# Altium PCB PCBFireflyCase.PcbDoc (part 1 of 2)
Units mil, origin at the board's own origin, x right, y up, seen from the top; angles counter-clockwise.
Board outline 2748 x 1806 mil, 2 copper layers (Top Layer, Bottom Layer); 145 components, 133 nets, 518 pads, 154 vias.
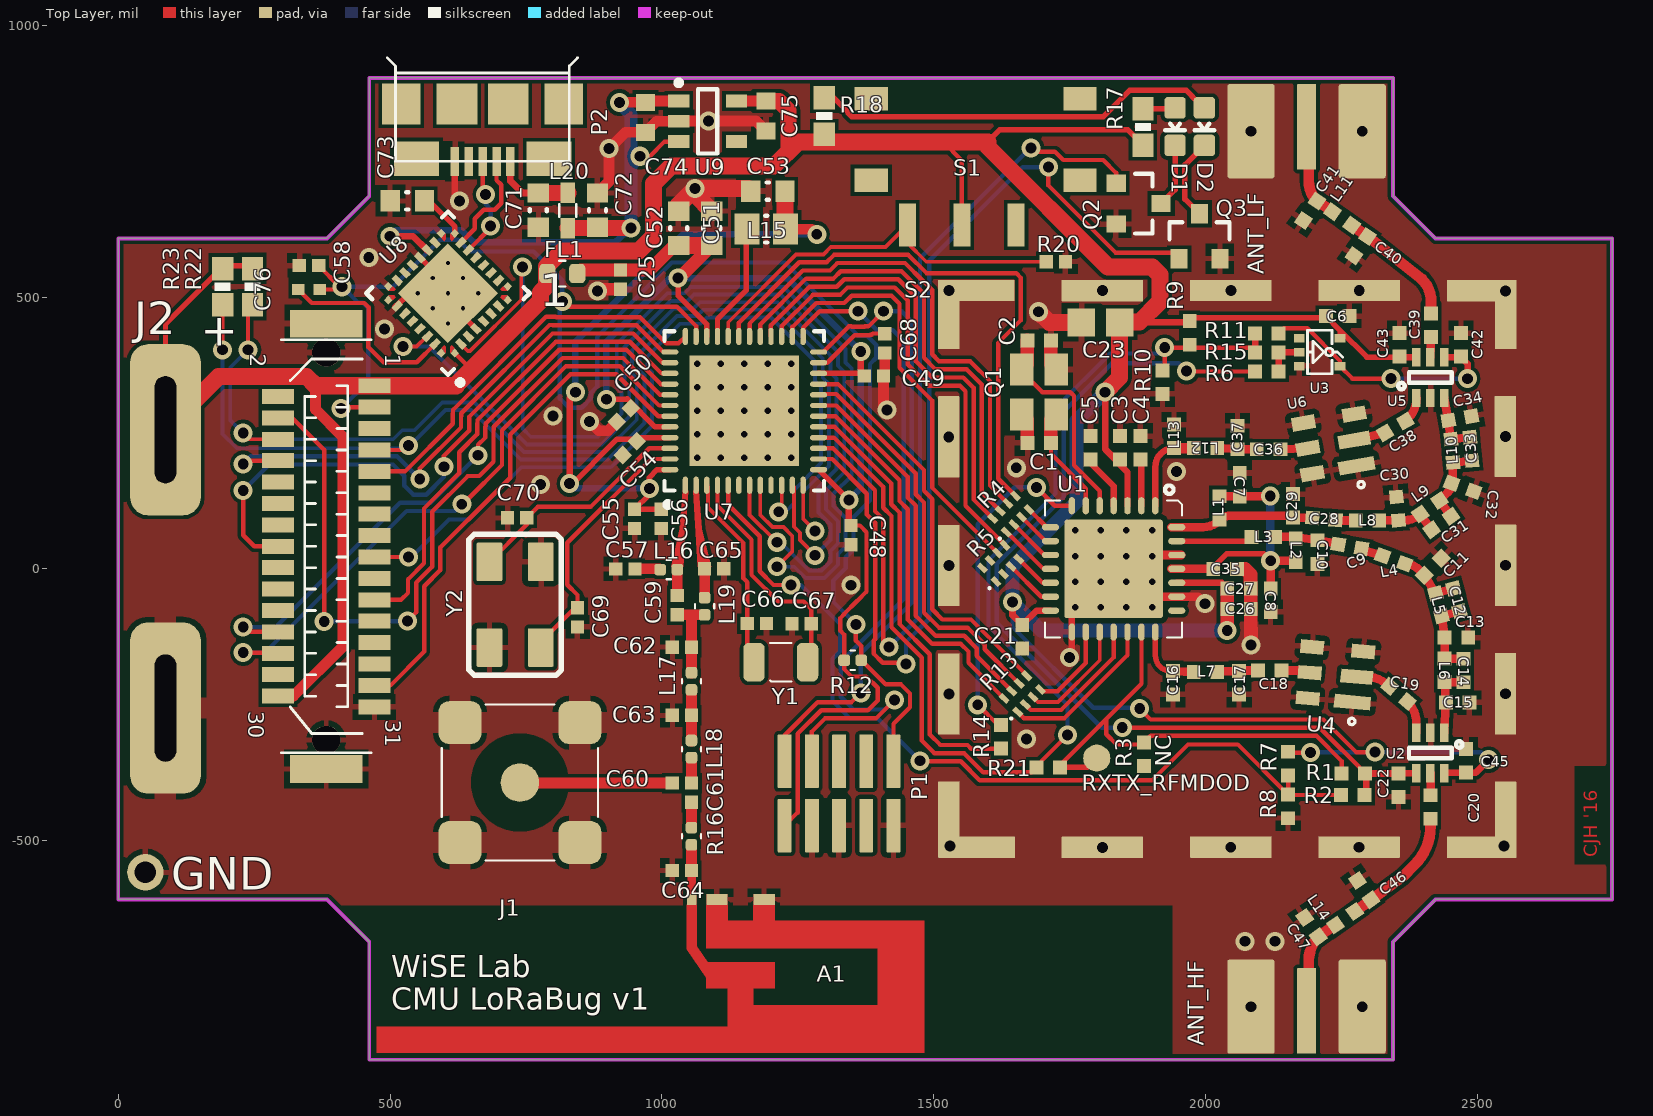
[diagram p0: Top Layer view]
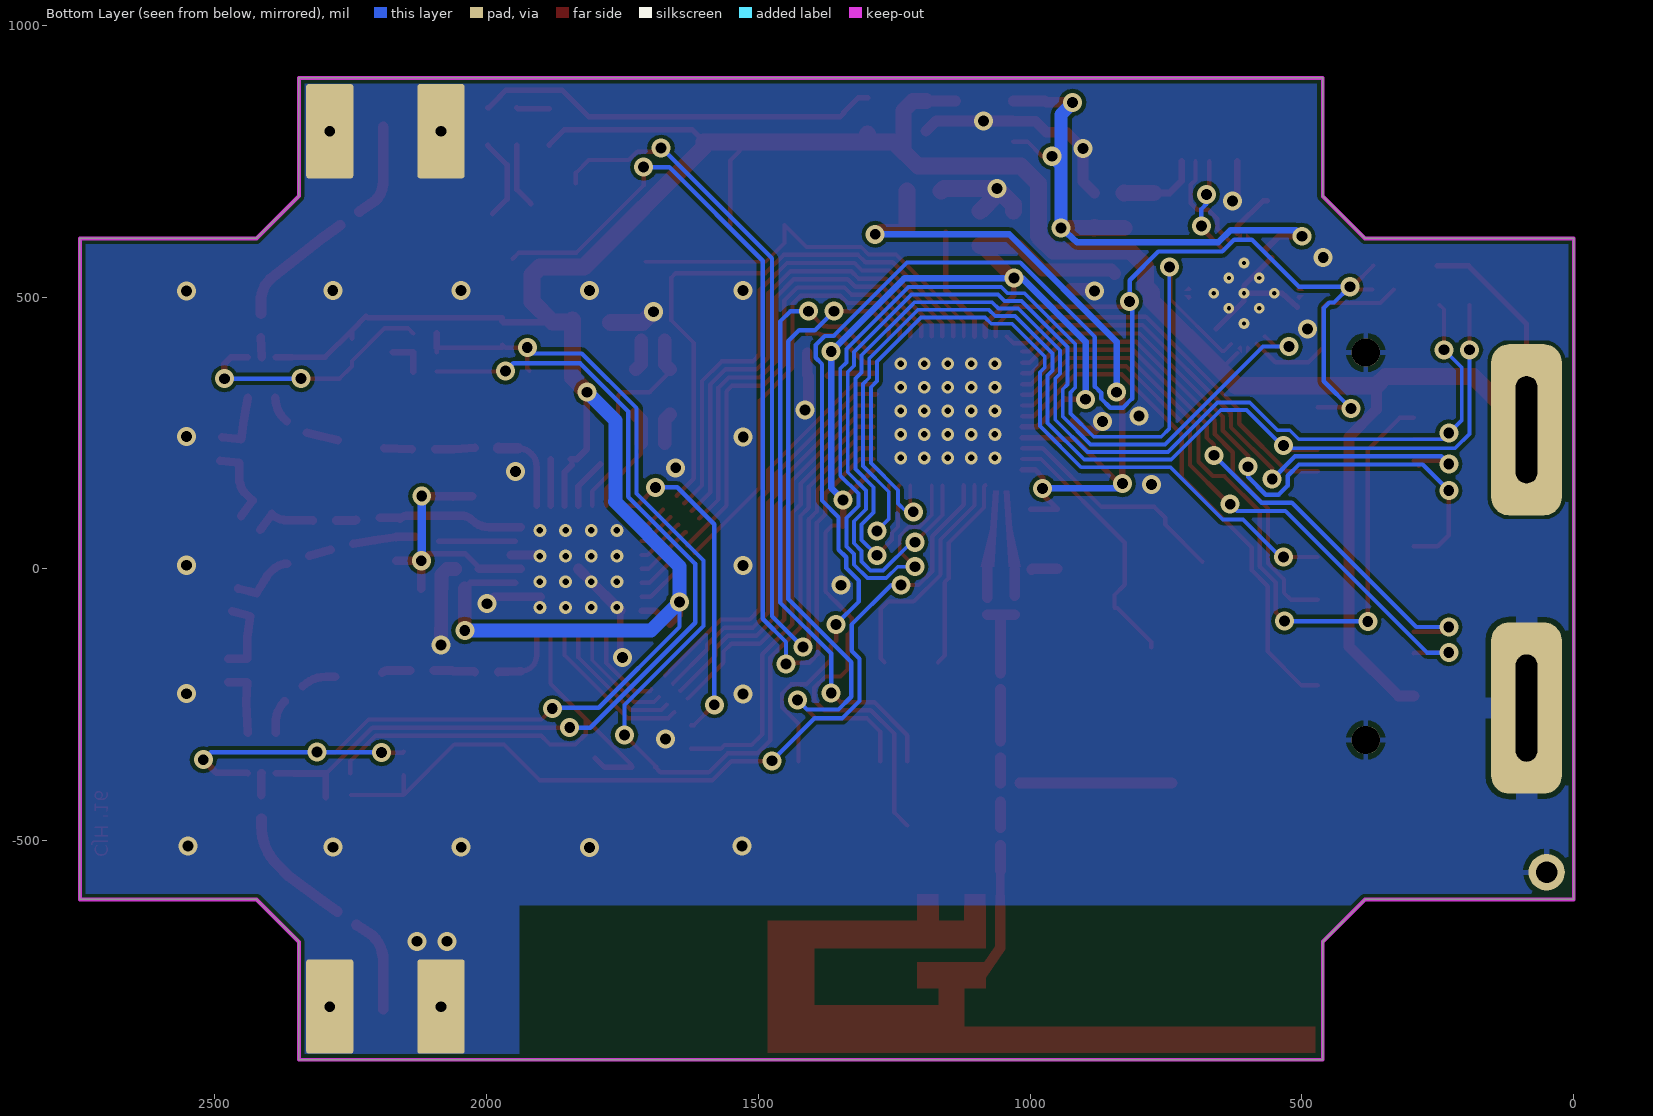
[diagram p1: Bottom Layer view, seen from below]

## Layer stack, top to bottom
Top Solder: solder mask 0.4, Solder Resist, Dk 3.5
Top Layer: signal copper 1.4
Dielectric 1: dielectric 12.6, FR-4, Dk 4.8
Bottom Layer: signal copper 1.4
Bottom Solder: solder mask 0.4, Solder Resist, Dk 3.5

## Board outline
0,0 0,608 384,608 462,686 462,903 2345,903 2345,686 2423,608 2748,608 2748,-608 2423,-608 2345,-686 2345,-903 462,-903 462,-686 384,-608 0,-608 0,0

## Design rules (kind name [scope] priority, off if disabled: settings)
Clearance [All] p1: gap=7
DiffPairsRouting [All] p1: maxlimit=1000 minlimit=7 mostfreqgap=7 toplayer_minwidth=7 toplayer_maxwidth=15 toplayer_prefwidth=7 bottomlayer_minwidth=7 bottomlayer_maxwidth=15 bottomlayer_prefwidth=7 maxuncoupledlength=500
MinimumAnnularRing [All] p1: minimumring=5
MinimumSolderMaskSliver [All] p1: minsoldermaskwidth=6.5
PolygonConnect "Battery Terminals Spoke" [HasFootprint('Battery Terminal')] p1: connectstyle=Relief reliefconductorwidth=40 reliefentries=4 polygonreliefangle="90 Angle" airgapwidth=10
PolygonConnect "SMA Antenna Direct Connect" [HasFootprint('SMA END LAUNCH JACK RECEPTACLE SHORT')] p2: connectstyle=Direct reliefconductorwidth=20 reliefentries=4 polygonreliefangle="90 Angle" airgapwidth=10
PolygonConnect "Sufrace Mount SMA Antenna Direct Connect" [HasFootprint('HUSTSAN_SMA10V21TGGAN_POLYGONPOUR_CUTOUT')] p3: connectstyle=Relief reliefconductorwidth=40 reliefentries=4 polygonreliefangle="90 Angle" airgapwidth=10
PolygonConnect "Shield Direct Connect" [HasFootprint('RFI_SHIELD_26.21X26.21MM_PADDED')] p4: connectstyle=Direct reliefconductorwidth=20 reliefentries=4 polygonreliefangle="90 Angle" airgapwidth=10
PolygonConnect "GND Via Direct Connect" [InNet('GND') AND IsVia] p5: connectstyle=Direct reliefconductorwidth=10 reliefentries=4 polygonreliefangle="90 Angle" airgapwidth=10
PolygonConnect [All] p6: connectstyle=Relief reliefconductorwidth=10 reliefentries=4 polygonreliefangle="90 Angle" airgapwidth=10
RoomDefinition "TI CC 2650 MCU + Radio" [InComponentClass('TI CC 2650 MCU + Radio')] p1: confinementstyle=ConfineIn formatcopy=TRUE lockcomponents=FALSE outline 946,1350 1749,1350 1749,3200 946,3200
RoomDefinition "Semtech SX1276 Radio" [InComponentClass('Semtech SX1276 Radio')] p2: confinementstyle=ConfineIn formatcopy=TRUE lockcomponents=FALSE outline 2810,-765 3710,-765 3710,630 2810,630
RoomDefinition Peripherals [InComponentClass('Peripherals')] p3: confinementstyle=ConfineIn formatcopy=TRUE lockcomponents=FALSE outline -47,3266 2299,3266 2299,3870 -47,3870
RoomDefinition Main [InComponentClass('Main')] p4: confinementstyle=ConfineIn formatcopy=TRUE lockcomponents=FALSE outline 783,2888.45 -496,2888.45 -496,1890.45 783,1890.45
RoomDefinition FTDIModule [InComponentClass('FTDIModule')] p5: confinementstyle=ConfineIn formatcopy=TRUE lockcomponents=FALSE outline 324,1153 899,1153 899,1721 324,1721
RoutingVias [All] p1: holewidth=19.7 width=39.4 viastyle="Through Hole" minholewidth=19.7 minwidth=19.7 maxholewidth=152 maxwidth=266
SilkToSilkClearance [All] p1: silktosilkclearance=7
SilkToSolderMaskClearance [IsPad] p1: minsilkscreentomaskgap=7 clearancetoexposedcopper=TRUE
SolderMaskExpansion [All] p1: expansion=4
Width [All] p1: maxlimit=787.4 minlimit=7 preferedwidth=8
26 further rules are at their usual default settings.

## Classes and differential pairs
net class DIO[0..30]: DIO0 DIO1 DIO2 DIO3 DIO4 DIO5 DIO6 DIO7 DIO8 DIO9 DIO10 DIO11 DIO12 DIO13 DIO14 DIO15 DIO16 DIO17 DIO18 DIO19 DIO20 DIO21 DIO22 DIO23 DIO24 DIO25 DIO26 DIO28
net class CBUS[0..4]: CBUS0 CBUS1 CBUS2 CBUS3 CBUS4
net class ADIO[0..7]: ADIO0 ADIO2 ADIO4 ADIO5 ADIO7 ADIO27 ADIO29 ADIO30
component class "TI CC 2650 MCU + Radio": A1 C25 C48 C49 C50 C51 C52 C53 C54 C55 C56 C57 C58 C59 C60 C61 C62 C63 C64 C65 C66 C67 C68 C69 C70 FL1 J1 L15 L16 L17 L18 L19 P1 R12 R16 U7 Y1 Y2
component class "Semtech SX1276 Radio": ANT_HF ANT_LF C1 C2 C3 C4 C5 C6 C7 C8 C9 C10 C11 C12 C13 C14 C15 C16 C17 C18 C19 C20 C21 C22 C23 C26 C27 C28 C29 C30 C31 C32 C33 C34 C35 C36 C37 C38 C39 C40 C41 C42 C43 C45 C46 C47 L1 L2 L3 L4 L5 L6 L7 L8 L9 L10 L11 L12 L13 L14 Q1 R1 R2 R3 R4 R5 R6 R7 R8 R9 R10 R11 R13 R14 R15 R21 RXTX_RFMDOD S2 U1 U2 U3 U4 U5 U6
component class Peripherals: 1 ? D1 D2 Q2 Q3 R17 R18 R20 R22 R23 S1
component class Main: C74 C75 C76 GND J2 U9
component class FTDIModule: C71 C72 C73 L20 P2 U8
differential pair XTA: +XTA_P -XTA_N
differential pair X24M: +X24M_P -X24M_N
differential pair RF: +RF_P -RF_N
differential pair USB_D: +USB_D_P -USB_D_N

## Components (designator, comment, footprint, x,y, rotation, side; value= is the part's Value field where it differs from the comment)
1 "Addon Board for Firefly Sensor Nodes    This version is compliant with Firefly Micro powered by Atmel Atmega128RFA1.    Connectors on female gender match those on Firefly Micro Board.    Connectors on male gender mate with Firefly Micro Board. Use these for addons." FIREFLY_MICRO_BOARD 1013,81 r0 top locked
A1 "ANTENNA_DN007" ANTENNA_DN007AN_NO_MASK 979,-744 r0 top locked
ANT_HF "SMA" "SMA END LAUNCH JACK RECEPTACLE SHORT" 2186,-813 r0 top locked
ANT_LF "SMA" "SMA END LAUNCH JACK RECEPTACLE SHORT" 2186,813 r180 top locked
C1 "Cap" rlc_402_smd 1694.05,231.32 r0 top
C2 "Cap" rlc_402_smd 1693.94,420.23 r180 top
C3 "Cap" rlc_402_smd 1843,223 r270 top
C4 "Cap" rlc_402_smd 1880.63,223.05 r270 top
C5 "Cap" rlc_402_smd 1788.34,223 r270 top
C6 "Cap" rlc_402_smd 2243,465 r0 top
C7 "Cap" rlc_402_smd 2063,155 r270 top
C8 "Cap" rlc_402_smd 2120,-58 r90 top
C9 "Cap" rlc_402_smd 2265.54,41.5 r170 top
C10 "Cap" rlc_402_smd 2206,31 r90 top
C11 "Cap" rlc_402_smd 2418,4 r225 top
C12 "Cap" rlc_402_smd 2462,-57 r105 top
C13 "Cap" rlc_402_smd 2461.61,-126.06 r180 top
C14 "Cap" rlc_402_smd 2474.7,-186.88 r90 top
C15 "Cap" rlc_402_smd 2463.95,-246.06 r180 top
C16 "Cap" rlc_402_smd 1940,-209.65 r90 top
C17 "Cap" rlc_402_smd 2062,-209.65 r90 top
C18 "Cap" rlc_402_smd 2118.31,-186.86 r180 top
C19 "Cap" rlc_402_smd 2355,-230 r140 top
C20 "Cap" rlc_402_smd 2414,-438 r90 top
C21 "Cap" rlc_402_smd 1662.99,-124.62 r90 top
C22 "Cap" rlc_402_smd 2355,-398 r270 top
C23 "Cap" rlc_805_smd 1807,453 r0 top
C25 "CAPACITOR" CAPC0402(1005)60_N 924,532 r90 top
C26 "Cap" rlc_402_smd 2061.65,-74 r180 top
C27 "Cap" rlc_402_smd 2061.65,-36 r180 top
C28 "Cap" rlc_402_smd 2218,92 r175 top
C29 "Cap" rlc_402_smd 2161,116 r270 top
C30 "Cap" rlc_402_smd 2353,111 r275 top
C31 "Cap" rlc_402_smd 2433.74,84.42 r215 top
C32 "Cap" rlc_402_smd 2473,150 r160 top
C33 "Cap" rlc_402_smd 2488.11,220.57 r275 top
C34 "Cap" rlc_402_smd 2468,277 r190 top
C35 "Cap" rlc_402_smd 2036,0 r180 top
C36 "Cap" rlc_402_smd 2116,220 r180 top
C37 "Cap" rlc_402_smd 2059,241.65 r270 top
C38 "Cap" rlc_402_smd 2349,261 r210 top
C39 "Cap" rlc_402_smd 2415,448 r270 top
C40 "Cap" rlc_402_smd 2285.42,593.89 r55 top
C41 "Cap" rlc_402_smd 2192.85,658.7 r55 top
C42 "Cap" rlc_402_smd 2470,412 r90 top
C43 "Cap" rlc_402_smd 2357,412 r270 top
C45 "Cap" rlc_402_smd 2479,-353 r270 top
C46 "Cap" rlc_402_smd 2292,-591 r305 top
C47 "Cap" rlc_402_smd 2195,-659 r305 top
C48 "CAPACITOR" CAPC0402(1005)60_N 1348,62 r90 top
C49 "CAPACITOR" CAPC0402(1005)60_N 1390,355 r180 top
C50 "CAPACITOR" CAPC0402(1005)60_N 930,283 r45 top
C51 "CAPACITOR" CAPC0603(1608)100_N 1092,626.5 r270 top
C52 "CAPACITOR" CAPC0603(1608)100_N 1031,626.5 r270 top
C53 "CAPACITOR" CAPC0603(1608)100_N 1195,695 r0 top
C54 "CAPACITOR" CAPC0402(1005)60_N 941,222 r45 top
C55 "CAPACITOR" CAPC0402(1005)60_N 949.9,92.05 r90 top
C56 "CAPACITOR" CAPC0402(1005)60_N 998.84,92.02 r90 top
C57 "CAPACITOR" CAPC0402(1005)60_N 932.75,-0.01 r0 top
C58 "CAPACITOR" CAPC0402(1005)60_N 351,558 r0 top
C59 "CAPACITOR" CAPC0402(1005)60_N 1028.45,-66.73 r90 top
C60 "CAPACITOR" CAPC0402(1005)60_N 1037,-394 r0 top
C61 "CAPACITOR" CAPC0402(1005)60_N 1054.52,-411.75 r90 top
C62 "CAPACITOR" CAPC0402(1005)60_N 1036.82,-143.9 r0 top
C63 "CAPACITOR" CAPC0402(1005)60_N 1036.85,-269.28 r0 top
C64 "CAPACITOR" CAPC0402(1005)60_N 1036.8,-554.75 r0 top
C65 "CAPACITOR" CAPC0402(1005)60_N 1096.4,0.46 r180 top
C66 "CAPACITOR" CAPC0402(1005)60_N 1174.82,-100.58 r180 top
C67 "CAPACITOR" CAPC0402(1005)60_N 1257,-101 r0 top
C68 "CAPACITOR" CAPC0402(1005)60_N 1410,415 r90 top
C69 "CAPACITOR" CAPC0402(1005)60_N 845,-89 r90 top
C70 "CAPACITOR" CAPC0402(1005)60_N 734,94 r0 top
C71 "Cap Semi" CAPC0603(1608)100_N 772.66,659.91 r90 top
C72 "Cap Semi" CAPC0603(1608)100_N 881.58,659.8 r270 top
C73 "Cap Semi" CAPC0603(1608)100_N 532,677 r0 top
C74 "Cap Semi" 1608[0603] 970.05,830.6 r90 top
C75 "Cap Semi" 1608[0603] 1191.67,833.19 r90 top
C76 "Cap Semi" 0402 351,514 r180 top
D1 "Green LED" LED-0603 1944,813.53 r180 top
D2 "Red LED" LED-0603 1998,813.53 r180 top
FL1 "BLM18HE152SN1" FIL_BLM18HE152SN1DL 816.88,543.28 r180 top
GND "Test Pin" pin_1mm 50,-558 r90 top
J1 "DNM" HUSTSAN_SMA10V21TGGAN_POLYGONPOUR_CUTOUT 739,-393 r90 top
J2 "Battery Terminal" "Battery Terminal" 87,0 r0 top locked
L1 "Inductor" rlc_402_smd 2026,112 r270 top
L2 "Inductor" rlc_402_smd 2166,34 r270 top
L3 "Inductor" rlc_402_smd 2106,59 r180 top
L4 "Inductor" rlc_402_smd 2346,17 r340 top
L5 "Inductor" rlc_402_smd 2428.6,-65.92 r285 top
L6 "Inductor" rlc_402_smd 2440,-186.65 r270 top
L7 "Inductor" rlc_402_smd 2000,-189.65 r0 top
L8 "Inductor" rlc_402_smd 2298,89 r0 top
L9 "Inductor" rlc_402_smd 2412.74,113.42 r35 top
L10 "Inductor" rlc_402_smd 2453.23,217.14 r95 top
L11 "Inductor" rlc_402_smd 2251.35,644.6 r145 top
L12 "Inductor" rlc_402_smd 2000,222.65 r0 top
L13 "Inductor" rlc_402_smd 1942,243.65 r270 top
L14 "Inductor" rlc_402_smd 2256.91,-642.76 r215 top
L15 "INDUCTOR" CAPC0805(2012)75_N 1192,625 r0 top
L16 "INDUCTOR" INDC1005X60L 1012.68,-1.33 r180 top
L17 "INDUCTOR" INDC1005X60L 1054.55,-206.75 r270 top
L18 "INDUCTOR" INDC1005X60L 1054.55,-331.49 r270 top
L19 "INDUCTOR" INDC1005X60L 1078.69,-68.68 r270 top
L20 "62 Ω" WE-CBA_0603_HC 826.96,659.21 r270 top
P1 "Cortex Debug Header" "Header 1.27mm 2x5 SMD" 1326,-413 r0 top
P2 "USB?" MICROUSB_TYPEB 820,855 r180 top locked
Q1 "Xtal" "nd3225da - nd2520da" 1693.94,325.54 r90 top
Q2 "Common NMOSFET Parts      MFG P/NStore IDProd ID   FDD8780		TRANS-09984	   SI7820DN		TRANS-11055	   FDS6630A		IC-08089	   2N7002PW		TRANS-11151	   FQP30N06L	  COM-10213	TRANS-10060	   BSS123LT1G		TRANS-08345	   BSS138		TRANS-00830	   BS170			   2N7000" SOT23-3 1875,672 r270 top
Q3 "Common NMOSFET Parts      MFG P/NStore IDProd ID   FDD8780		TRANS-09984	   SI7820DN		TRANS-11055	   FDS6630A		IC-08089	   2N7002PW		TRANS-11151	   FQP30N06L	  COM-10213	TRANS-10060	   BSS123LT1G		TRANS-08345	   BSS138		TRANS-00830	   BS170			   2N7000" SOT23-3 1989,610 r0 top
R1 "Resistor" rlc_402_smd 2272,-376 r0 top
R2 "Resistor" rlc_402_smd 2271,-416 r180 top
R3 "Resistor" rlc_402_smd 1887,-341 r270 top
R4 "EXBN8VxxxJX" EXB28V 1642,101 r45 top
R5 "EXBN8VxxxJX" EXB28V 1623,10 r45 top
R6 "Resistor" rlc_402_smd 2113,363 r0 top
R7 "Resistor" rlc_402_smd 2152,-358 r270 top
R8 "Resistor" rlc_402_smd 2152,-437 r270 top
R9 "Resistor" rlc_402_smd 1971,434 r270 top
R10 "Resistor" rlc_402_smd 1921,343 r270 top
R11 "Resistor" rlc_402_smd 2113,433 r180 top
R12 "RESISTOR" RESC1005X40L 1351,-168 r180 top
R13 "EXBN8VxxxJX" EXB28V 1663,-230 r45 top
R14 "Resistor" rlc_402_smd 1624,-309 r270 top
R15 "Resistor" rlc_402_smd 2113,398 r180 top
R16 "RESISTOR" RESC1005X40L 1054.52,-491.75 r90 top
R17 "RES-00818" 0603-RES 1885,813 r90 top
R18 "RES-00818" 0603-RES 1299,833 r90 top
R20 "RES-00824" CAPC0402(1005)60_N 1725,565 r180 top
R21 "Resistor" rlc_402_smd 1711,-365 r180 top
R22 "RES-00824" 0603-RES 247,519 r90 top
R23 "RES-00824" 0603-RES 192,519 r90 top
RXTX_RFMDOD "Test Pin" pin_SMD 1800,-348 r90 top
S1 "CFPA" CFPA-1FB4 1577,790 r0 top locked
S2 "RFI Shield 26.21x26.21mm" RFI_SHIELD_26.21X26.21MM_PADDED 2040,0 r0 top locked
U1 "SX1276" vqfn28_6x6mm 1831,0 r270 top locked
U2 "RF Switch" SC70-6 2413.67,-338.64 r270 top
U3 "NC7SZ04" NC7SZ04_SC70 2172.65,424 r270 top
U4 "SAW Filter" DCC6C_3.0x3.0mm 2239,-195 r175 top
U5 "RF Switch" SC70-6 2413.67,352 r90 top
U6 "SAW Filter" DCC6C_3.0x3.0mm 2235,230 r190 top
U7 "CC2650F128RGZT" QFN50P700X700X100_HS-49N 1151.58,290.71 r90 top locked
U8 "FT232RQ-Tube" PQFN5X5-32_V 606.63,507.07 r135 top locked
U9 "MIC5504-3.3YM5-TR" MIC5504-3.3YM5-TR 1084.15,823.3 r0 top
Y1 "CRYSTAL" XTAL_FC-135N 1218.82,-171.58 r0 top
Y2 "XTAL_4PIN_S" "Crystal 4-SMD 5.0x3.2mm" 730.12,-65.88 r90 top

## Footprints (in the part's own frame and the unit in brackets; to place one, negate y for a bottom-side part, rotate by r counter-clockwise, add the part's x,y. Pads: shape width x height; smd on the part's side, far side on the other; paste and mask are expansions set on the pad)
0402 [mm] "Chip Capacitor, Body 1.0x0.5mm, IPC High Density"
  rect 0.6x0.5 smd: 1(-0.5,0) 2(0.5,0)
  body extent -0.55,-0.3 0.55,0.3, height 1.3
0603-RES [mm]
  rect 1.1x1 smd: 1(-0.85,0) 2(0.85,0)
  silkscreen extent -0.19,-0.38 0.19,0.38
1608[0603] [mm] "Chip Capacitor, Body 1.6x0.8mm, IPC High Density"
  rect 0.8x0.9 smd: 1(-0.7,0) 2(0.7,0)
  body extent -0.87,-0.48 0.87,0.48, height 1.3
ANTENNA_DN007AN_NO_MASK [mm] "ANTENNA_DN007AN"
  rect 0.46x0.5 smd paste-0.5 mask-0.5: 1(1.93,3.455)
  rect 1x0.5 smd paste-100 mask-1: 2(3.11,3.455)
  rect 1x0.5 smd paste-100 mask-100: 3(5.31,3.455)
  Top Layer region: 12.79,2.465 12.79,-3.705 -12.79,-3.705 -12.79,-2.495 3.61,-2.495 3.61,-0.695 2.61,-0.695 2.61,-0.193 1.7,1.127 1.7,3.205 2.16,3.205 2.16,1.27 2.681,0.515 5.81,0.515 5.81,-0.695 4.81,-0.695 4.81,-1.495 10.61,-1.495 10.61,1.175 2.61,1.175 2.61,3.205 3.61,3.205 3.61,2.465 4.81,2.465 4.81,3.205 5.81,3.205 5.81,2.465 12.79,2.465
"Battery Terminal" [mm] "Battery terminal for the firefly case"
  rrect50% 3.3x8 hole 1 slot 5 at 90 deg: neg(0,-6.5) pos(0,6.5)
CAPC0402(1005)60_N [mm] "Chip Capacitor, Body 1.0x0.5mm, Height 0.6mm, IPC Medium Density"
  rect 0.62x0.62 smd: 1(-0.45,0) 2(0.45,0)
  body extent -0.55,-0.3 0.55,0.3, height 0.6
CAPC0603(1608)100_N [mm] "Chip Capacitor, Body 1.6x0.8mm, Height 1.0mm, IPC Medium Density"
  rect 0.9x1 smd: 1(-0.8,0) 2(0.8,0)
  silkscreen extent -0.05,-0.4 0.05,0.4, body extent -0.87,-0.48 0.88,0.47, height 1
CAPC0805(2012)75_N [mm] "Chip Capacitor, Body 2.0x1.2mm, Height 0.75mm, IPC Medium Density"
  rect 1.15x1.45 smd: 1(-0.9,0) 2(0.9,0)
  silkscreen extent -0.05,-0.62 0.05,0.63, body extent -1.1,-0.72 1.1,0.73, height 0.75
CFPA-1FB4 [mm]
  rect 1.55x1.1 smd: 1(-4.875,-1.905) 2(4.875,-1.905) 3(4.875,1.905) 4(-4.875,1.905)
  rect 0.8x2 smd: P1(-3.18,-4) P2(-0.64,-4) P3(1.9,-4)
  body extent -5.54,-4.45 5.46,8.92, height 5.52
"Crystal 4-SMD 5.0x3.2mm" [mm] "Crystal 4-SMD 5.0x3.2mm"
  rrect10% 1.8x1.2 smd: 1(-2,-1.2) 2(2,-1.2) 3(2,1.2) 4(-2,1.2)
  silkscreen extent -3.3,-2.16 3.3,2.16, body extent -2.5,-1.59 2.5,1.59, height 1.1
DCC6C_3.0x3.0mm [mm] "DCC6C footprint, 3.0x3.0mm"
  rrect5% 1.7x0.65 smd mask+0.05: 1(-0.9,1.2)
  rrect5% 1.5x0.65 smd mask+0.05: 2(-1,0)
  rrect5% 1.1x0.65 smd mask+0.05: 3(-1.2,-1.2) 4(1.2,-1.2) 5(1.2,0) 6(1.2,1.2)
  silkscreen extent -1.1,1.95 -0.8,2.25, body extent -1.5,-1.5 1.5,1.5, height 1
EXB28V [mm] "Chip Resistor Array, (0402x4); SM; 8 Leads; Body 2.10 x 1.10 mm (LxW max)"
  rect 0.25x0.5 smd mask+0.05: 1(-0.75,-0.45) 2(-0.25,-0.45) 3(0.25,-0.45) 4(0.75,-0.45) 5(0.75,0.45) 6(0.25,0.45) 7(-0.25,0.45) 8(-0.75,0.45)
  silkscreen extent -1.23,-0.5 -1.13,-0.4
FIL_BLM18HE152SN1DL [mm] "FIL_BLM18HE152SN1DL"
  rrect50% 0.752x0.9 smd: 1(-0.7,0) 2(0.7,0)
  silkscreen extent -0.15,-0.6 0.15,0.6
FIREFLY_MICRO_BOARD [mil]
  rect 59.06x27.56 smd: 1(-541.67,255.86) 2(-718.83,236.17) 3(-541.67,216.49) 4(-718.83,196.8) 5(-541.67,177.12) 6(-718.83,157.43) 7(-541.67,137.75) 8(-718.83,118.06) 9(-541.67,98.38) 10(-718.83,78.69) 11(-541.67,59.01) 12(-718.83,39.32) 13(-541.67,19.64) 14(-718.83,-0.05) 15(-541.67,-19.73) 16(-718.83,-39.42) 17(-541.67,-59.1) 18(-718.83,-78.79) 19(-541.67,-98.47) 20(-718.83,-118.16) 21(-541.67,-137.84) 22(-718.83,-157.53) 23(-541.67,-177.21) 24(-718.83,-196.9) 25(-541.67,-216.58) 26(-718.83,-236.27) 27(-541.67,-255.95) 28(-718.83,-275.64) 29(-541.67,-295.32) 30(-718.83,-315.01) 31(-541.67,-334.69)
  round 52 hole 52: 31(-630.25,-395.72) 31(-630.25,316.88)
  rect 133.86x51.18 smd: M3(-630.25,-448.87) M4(-630.25,370.03)
  silkscreen extent -713,-419 -548,340, body extent -740,-454 -520,377, height 130
"Header 1.27mm 2x5 SMD" [mm] "Header 1.27mm 5x2 SMD"
  rrect10% 0.65x2.5 smd: 1(-2.54,-1.5) 2(-2.54,1.5) 3(-1.27,-1.5) 4(-1.27,1.5) 5(0,-1.5) 6(0,1.5) 7(1.27,-1.5) 8(1.27,1.5) 9(2.54,-1.5) 10(2.54,1.5)
  body extent -3.17,-2.75 3.18,2.75, height 6.4
HUSTSAN_SMA10V21TGGAN_POLYGONPOUR_CUTOUT [mm] "HUSTSAN_SMA10V21TGGAN With A GND Plane Cutout"
  round 1.801 smd: 1(0,0)
  rrect48% 2x2 smd: 2(-2.8,-2.8) 3(2.8,-2.8) 4(2.8,2.8) 5(-2.8,2.8)
  Top Layer pour cut-out: 0,-2.3 -0.88,-2.125 -1.626,-1.626 -2.125,-0.88 -2.3,0 -2.3,0 -2.125,0.88 -1.626,1.626 -0.88,2.125 0,2.3 0,2.3 0.88,2.125 1.626,1.626 2.125,0.88 2.3,0 2.3,0 2.125,-0.88 1.626,-1.626 0.88,-2.125 0,-2.3
  silkscreen extent -3.65,-3.65 3.65,3.65
INDC1005X60L [mm] "INDC1005X60L"
  rrect50% 0.55x0.54 smd: 1(-0.4,0) 2(0.4,0)
  silkscreen extent -0.1,-0.45 0.1,0.45
LED-0603 [mm]
  rrect30% 1x1 smd: A(0,-0.877) C(0,0.877)
  silkscreen extent -0.46,-0.14 0.46,0.17
MIC5504-3.3YM5-TR [mm] "SOT23, 5-Leads, Body 2.90x2.80mm, Pitch 0.95mm, IPC Medium Density"
  rect 1x0.6 smd: EN(-1.35,-0.95) GND(-1.35,0) NC(1.35,-0.95) VIN(-1.35,0.95) VOUT(1.35,0.95)
  silkscreen extent -1.47,-1.5 0.45,1.92, body extent -0.85,-1.5 0.85,1.5, height 1.45
MICROUSB_TYPEB [mm]
  rect 0.4x1.35 smd: Pin1(2.5,2.675) Pin2(3.15,2.675) Pin3(3.8,2.675) Pin4(4.45,2.675) Pin5(5.1,2.675)
  rect 1.8x1.9 smd: Shield1(0,0) Shield4(7.6,0)
  rect 1.9x1.9 smd: Shield2(2.6,0) Shield3(5,0)
  rect 2.1x1.6 smd: Shield5(0.7,2.55) Shield6(6.9,2.55)
  silkscreen extent -0.63,-2.16 8.25,2.68, body extent -0.18,-2.4 7.8,3.03, height 2.72
NC7SZ04_SC70 [mm] "NC7SZ04 TinyLogic UHS Inverter SC70 Package"
  rect 0.4x0.5 smd: 1(0,0) 2(0.65,0) 3(1.3,0) 4(1.3,1.9) 5(0,1.9)
  silkscreen extent -0.38,0.38 1.65,2.03
"nd3225da - nd2520da" [mm] "Crystal SMD 3.2x2.5mm compatible with 2.5x2.0mm"
  rect 1.5x1.1 smd mask+0.05: 1(-1.05,-0.8) 2(1.05,-0.8) 3(1.05,0.8) 4(-1.05,0.8)
  body extent -1.6,-1.25 1.6,1.25, height 1
pin_1mm [mm] "Generic Pin 1.1mm; 1 Lead"
  round 1.7 hole 1 paste+0 mask+0.05: 1(0,0)
pin_SMD [mil] "Generic Pin; 1 pin SMD"
  round 50 smd paste-39.37 mask+1.97: 1(0,0)
PQFN5X5-32_V [mm] "QFN, 32-Leads, Body 5x5mm, Pitch 0.5mm, Thermal Pad 3.3x3.3mm, FTDI Recommended"
  rect 0.3x0.3 smd paste-0.15 mask-0.15: 1(-2.2,1.75) 8(-2.2,-1.75) 9(-1.75,-2.2) 16(1.75,-2.2) 17(2.2,-1.75) 24(2.2,1.75) 25(1.75,2.2) 32(-1.75,2.2)
  rect 0.5x0.3 smd paste-0.15 mask+0.06: 2(-2.1,1.25) 3(-2.1,0.75) 4(-2.1,0.25) 5(-2.1,-0.25) 6(-2.1,-0.75) 7(-2.1,-1.25) 18(2.1,-1.25) 19(2.1,-0.75) 20(2.1,-0.25) 21(2.1,0.25) 22(2.1,0.75) 23(2.1,1.25)
  rect 0.3x0.5 smd paste-0.15 mask+0.06: 10(-1.25,-2.1) 11(-0.75,-2.1) 12(-0.25,-2.1) 13(0.25,-2.1) 14(0.75,-2.1) 15(1.25,-2.1) 26(1.25,2.1) 27(0.75,2.1) 28(0.25,2.1) 29(-0.25,2.1) 30(-0.75,2.1) 31(-1.25,2.1)
  rect 3.3x3.3 smd paste-1.65 mask+0.06: 33(0,0)
  Top Layer region: 1.6,-1.85 1.6,-2.05 1.9,-2.05 1.7,-1.85
  Top Layer region: -1.6,2.05 -1.6,1.85 -1.7,1.85 -1.9,2.05
  Top Layer region: 1.6,2.05 1.6,1.85 1.7,1.85 1.9,2.05
  Top Layer region: -1.6,-2.05 -1.6,-1.85 -1.7,-1.85 -1.9,-2.05
  Top Layer region: -2.05,1.6 -1.85,1.6 -1.85,1.7 -2.05,1.9
  Top Layer region: 2.05,1.6 1.85,1.6 1.85,1.7 2.05,1.9
  Top Layer region: 2.05,-1.6 1.85,-1.6 1.85,-1.7 2.05,-1.9
  Top Layer region: -2.05,-1.6 -1.85,-1.6 -1.85,-1.7 -2.05,-1.9
  silkscreen extent -3.47,-2.7 2.7,2.7, body extent -2.55,-2.55 2.55,2.55, height 1
QFN50P700X700X100_HS-49N [mm] "QFN, 48-Leads, Body 7.00x7.00mm, Pitch 0.50mm, Thermal Pad 5.15x5.10mm, IPC Medium Density"
  oval 0.8x0.25 smd: 1(-3.475,2.75) 2(-3.475,2.25) 3(-3.475,1.75) 4(-3.475,1.25) 5(-3.475,0.75) 6(-3.475,0.25) 7(-3.475,-0.25) 8(-3.475,-0.75) 9(-3.475,-1.25) 10(-3.475,-1.75) 11(-3.475,-2.25) 12(-3.475,-2.75) 25(3.475,-2.75) 26(3.475,-2.25) 27(3.475,-1.75) 28(3.475,-1.25) 29(3.475,-0.75) 30(3.475,-0.25) 31(3.475,0.25) 32(3.475,0.75) 33(3.475,1.25) 34(3.475,1.75) 35(3.475,2.25) 36(3.475,2.75)
  oval 0.25x0.8 smd: 13(-2.75,-3.475) 14(-2.25,-3.475) 15(-1.75,-3.475) 16(-1.25,-3.475) 17(-0.75,-3.475) 18(-0.25,-3.475) 19(0.25,-3.475) 20(0.75,-3.475) 21(1.25,-3.475) 22(1.75,-3.475) 23(2.25,-3.475) 24(2.75,-3.475) 37(2.75,3.475) 38(2.25,3.475) 39(1.75,3.475) 40(1.25,3.475) 41(0.75,3.475) 42(0.25,3.475) 43(-0.25,3.475) 44(-0.75,3.475) 45(-1.25,3.475) 46(-1.75,3.475) 47(-2.25,3.475) 48(-2.75,3.475)
  rect 5.15x5.1 smd paste-5.15: 49(0,0)
  silkscreen extent -4.5,-3.73 3.73,3.72, body extent -3.58,-3.58 3.58,3.58, height 1
RESC1005X40L [mm] "RESC1005X40L"
  rrect50% 0.55x0.54 smd: 1(-0.4,0) 2(0.4,0)
  silkscreen extent -0.1,-0.45 0.1,0.45
RFI_SHIELD_26.21X26.21MM_PADDED [mm]
  rrect5% 1x3.8 smd: SHIELD(-13.01,6.171) SHIELD(-13.007,-5.845) SHIELD(-13.005,0.157) SHIELD(12.998,6.184) SHIELD(13.001,-5.831) SHIELD(13.003,0.17)
  rrect5% 1x3.24 smd: SHIELD(-13.008,11.885) SHIELD(13.004,11.885)
  rrect5% 1x3.57 smd: SHIELD(-13.003,-11.721) SHIELD(13.007,-11.719)
  rrect5% 3.57x1 smd: SHIELD(-11.717,13.008) SHIELD(-11.709,-13.01)
  rrect5% 3.8x1 smd: SHIELD(-5.836,-13.009) SHIELD(-5.834,13.001) SHIELD(0.166,-13.004) SHIELD(0.168,13.007) SHIELD(6.164,-13.004) SHIELD(6.166,13.007)
  rrect5% 3.24x1 smd: SHIELD(11.883,13.005) SHIELD(11.884,-13.007)
rlc_402_smd [mm] "Chip SMD component 402; Body 1.0 x 0.5 mm (LxW typ)"
  rect 0.65x0.65 smd mask+0.05: 1(-0.55,0) 2(0.55,0)
rlc_805_smd [mm] "Chip SMD component 805; Body 2.0 x 1.25 mm (LxW typ)"
  rect 1.3x1.3 smd mask+0.05: 1(-0.9,0) 2(0.9,0)
SC70-6 [mm] "SC70 6-Leads, Body 2.0x1.25mm, Pitch 0.65mm"
  rect 0.85x0.4 smd mask+0.05: 1(-0.95,0.65) 2(-0.95,0) 3(-0.95,-0.65) 4(0.95,-0.65) 5(0.95,0) 6(0.95,0.65)
  silkscreen extent -0.55,-1 0.25,1.5, body extent -0.63,-1 0.62,1, height 1.45
"SMA END LAUNCH JACK RECEPTACLE SHORT" [mm] "SMA Connector - End Launch Jack Receptacle - Short"
  rrect10% 0.9x4 smd paste+0 mask+0.05: 1(0,0)
  rrect10% 2.2x4.4 hole 0.5 mask+0.05: 2(-2.6,0.2) 2(2.6,0.2)
SOT23-3 [mil]
  rect 31.5x35.43 smd: 1(-37.4,-39.37) 2(37.4,-39.37) 3(0,43.31)
  silkscreen extent -55,-4 55,28
vqfn28_6x6mm [mm] "28 Leads, Body 6.0x6.0mm, Pitch 0.65mm, VQFN28"
  oval 0.8x0.3 smd mask+0.05: 1(-2.95,1.95) 2(-2.95,1.3) 3(-2.95,0.65) 4(-2.95,0) 5(-2.95,-0.65) 6(-2.95,-1.3) 7(-2.95,-1.95) 15(2.95,-1.95) 16(2.95,-1.3) 17(2.95,-0.65) 18(2.95,0) 19(2.95,0.65) 20(2.95,1.3) 21(2.95,1.95)
  oval 0.3x0.8 smd mask+0.05: 8(-1.95,-2.95) 9(-1.3,-2.95) 10(-0.65,-2.95) 11(0,-2.95) 12(0.65,-2.95) 13(1.3,-2.95) 14(1.95,-2.95) 22(1.95,2.95) 23(1.3,2.95) 24(0.65,2.95) 25(0,2.95) 26(-0.65,2.95) 27(-1.3,2.95) 28(-1.95,2.95)
  rrect5% 4.6x4.6 smd paste-3.3 mask+0.05: 29(0,0)
  Mechanical 15 keep-out lines w0.1: 3.5,-3.5 -3.5,-3.5 -3.5,3.5 3.5,3.5 3.5,-3.5
  silkscreen extent -3.9,-3.2 3.2,3.2, body extent -3,-3 3,3, height 1
WE-CBA_0603_HC [mm] "High Current type"
  rect 0.95x0.7 smd: 1(-0.825,0) 2(0.825,0)
  silkscreen extent -0.29,-0.4 0.29,0.4, body extent -0.8,-0.4 0.8,0.4, height 0.81
XTAL_FC-135N [mm] "XTAL_FC-135N"
  rrect50% 1x1.8 smd: 1(-1.25,0) 2(1.25,0)
  silkscreen extent -0.5,-0.9 0.5,0.9

## Part data
1: library part FIREFLY_MICRO_BOARD
ANT_HF ANT_LF: "SMA Straight Connector"
C1 C2 C3 C4 C5 C6 C7 C8 C9 C10 C11 C12 C13 C14 C15 C16 C17 C18 C19 C20 C21 C22 C23 C26 C27 C28 C29 C30 C31 C32 C33 C34 C35 C36 C37 C38 C39 C40 C41 C42 C43 C45 C46 C47: "Capacitor SMD"
C71 C72 C73 C74 C75 C76: "Capacitor (Semiconductor SIM Model)"
D1: library part LED-GREEN0603
D2: library part LED-RED0603
FL1: library part FILTER_2PIN
GND RXTX_RFMDOD: library part test_pin
J1: library part CONN_COAX_1+4
L1 L2 L3 L4 L5 L6 L7 L8 L9 L10 L11 L12 L13 L14: "Inductor SMD"
L20: library part "WE-CBA 0603,  782633620", "WE-CBA SMD EMI Suppression Ferrite Bead, Impedance = 62 O, High Current"
P1: library part "Header 5X2", "Header, 5-Pin, Dual row, Right Angle"
P2: library part "MicroUSB TypeB", "Micro USB Type B Port"
Q1: library part "Xtal GND", "Crystal with GND pins"
Q2 Q3: library part MOSFET-NCHANNELBSS138
R1 R2 R3 R6 R7 R8 R9 R10 R11 R14 R15 R21: "Resistor SMD - IEC symbol version"
R4 R5 R13: "Mini-Flat Package, Isolated Resistor Network, 0.031 W/resistor"
R17 R18: library part 330OHM1/10W1%(0603)
R20 R22 R23: library part 10KOHM-1/10W-1%(0603)0603
S2: library part RFI_SHIELD_26.21x26.21mm
U1: "SX1276 - Low Power Integrated UHF Transceiver with loRa Modem"
U2 U5: library part "PE4259 RF Switch", "PE4259 Peregrine RF Switch"
U3: "NC7SZ04 TinyLogic UHS Inverter SC70 Package"
U4 U6: "SAW Filter - Bandpass - TEMEX type"
U8: "USB UART Asynchronous Serial Data Transfer Chip, 32-pin QFN, Tube"

## Via types
v1: diameter 35, hole 20, Top Layer to Bottom Layer, 100 vias
v2: diameter 23.62, hole 11.81, Top Layer to Bottom Layer, 25 vias
v3: diameter 23.62, hole 11.81, Top Layer to Bottom Layer, tented top, 16 vias
v4: diameter 19.68, hole 7.87, Top Layer to Bottom Layer, tented top, 9 vias
v5: diameter 34.48, hole 19.7, Top Layer to Bottom Layer, 4 vias

## Nets (pads, with @x,y where several pads share a name; then routed paths per layer and width w, separated by ;. In a path a pad name is that pad's centre, name@x,y a point inside that pad or via, vN(x,y) a via of type N, cw(c..) or ccw(c..) an arc to the next point about the centre after c; other vN are vias at no path point)
!SS: 1.10
ADIO0: 1.23
ADIO2: 1.25
ADIO4: 1.27
ADIO5: 1.28
ADIO7: 1.22
ADIO27: 1.24 U7.40 | length 1116.2
  Top Layer w8: v1(230,-107) 238.9,-115.9 1.24@294.17,-115.9 ; v1(662,209) 662,228.19 675.5,241.69 675.5,261.7 676,262.2 676,267.64 811.36,403 934.97,403 998.05,339.92 U7.40@1014.77,339.92
  Bottom Layer w8: v1(230,-107) 290,-107 518.55,121.55 574.55,121.55 v1(662,209)
ADIO29: 1.26 U7.42 | length 1120.7
  Top Layer w8: v1(230,-154) 292.9,-154 1.26@294.17,-155.27 ; v1@643,128 706,191 706,255.21 823.79,373 922.55,373 995,300.55 U7.42@1014.77,300.55
  Bottom Layer w8: v1(230,-154) 269.99,-154 530.54,106.55 619.55,106.55 v1(632,119)
ADIO30: 1.29 U7.43 | length 953.5
  Top Layer w8: 1.29@471.33,-214.32 500.68,-214.32 563,-152 563,-31.73 592.5,-2.23 592.5,39.5 643.5,90.5 ; 643.81,90.5 721,167.69 721,247 832,358 916.33,358 993.47,280.86 U7.43@1014.77,280.86
CBUS0: U8.22
CBUS1: U8.21
CBUS2: U8.10
CBUS3: U8.11
CBUS4: U8.9
CTRL2: C42.1 R11.1 U3.4 U5.4 | length 470.6
  Top Layer w8: R11.1@2134.65,433 2144.53,442.87 2187.05,442.87 2247.46,382.47 U3.4@2247.46,372.82 2270.28,350 v1(2341,350)
  Top Layer w12: U5.4@2439.26,389.4 2469.95,389.4 2470,389.35 2482,377.35 v5(2482,350)
  Bottom Layer w8: v1(2341,350) v5(2482,350)
DCDC_SW: L15.1 U7.33 | length 213.5
  Top Layer w10: U7.33@1102.37,427.52 1102.37,459.63 1155.57,512.84 L15.1@1155.57,619
DIO0: R2.2 R7.2 R8.1 U7.5 | length 1615.3
  Top Layer w8: U7.5@1122.05,153.9 1122.05,118.05 1180,60.1 1180,-4.31 1205.39,-29.7 v1(1237.7,-29.7) ; v1(1475,-352.93) 1476.07,-354 1549.79,-354 1584.79,-389 1901.8,-389 1967.8,-323 2059.65,-323 R8.1@2152,-415.35 ; R7.2@2152,-379.65 R8.1@2152,-415.35 ; R2.2@2249.35,-416 2152.65,-416 R8.1@2152,-415.35
  Bottom Layer w8: v1(1237.7,-29.7) 1255.7,-29.7 1328.5,-102.5 1328.5,-150.77 1314,-165.27 1314,-243 1346,-275 1397.07,-275 v1(1475,-352.93)
DIO0_SX: R4.4 U1.8 | length 52.9
  Top Layer w8: R4.4@1675.41,109.35 1707.99,76.77 U1.8@1714.86,76.77
DIO1: U7.6
DIO1_SX: R4.3 U1.9 | length 71.7
  Top Layer w8: R4.3@1661.49,95.43 1705.74,51.18 U1.9@1714.86,51.18
DIO2: U7.7 U8.30 | length 1844
  Top Layer w7: v1(524,409) 549,409 567.73,427.73 U8.30@569.04,427.73 ; U7.7@1161.42,153.9 1161.42,99.18 1211.6,49 v1(1212,49)
  Bottom Layer w7: v1(524,409) 572,409 752,229 888.8,229 940,280.2 940,330.4 931.17,339.23 931.17,408.03 1016.14,493 1047.4,493 1058.9,504.5 1218.3,504.5 1220.8,502 1220.87,502 1324,398.87 1324,373.7 1335.5,362.2 1335.5,177.9 1302,144.4 1302,109.6 1324,87.6 1324,47.2 1310,33.2 1310,13.4 1293.6,-3 1270.4,-3 1218.4,49 v1(1212,49)
DIO2_SX: R4.2 U1.10 | length 90.5
  Top Layer w8: R4.2@1647.57,81.51 1703.49,25.59 U1.10@1714.86,25.59
DIO3: U7.8 U8.2 | length 2121.4
  Top Layer w7: U8.2@630.29,413.81 643.1,401 647.3,401 741.5,495.2 741.5,552.5 v1(744,555) ; U7.8@1181.11,153.9 1181.11,99.3 1203.4,77 1223.6,77 1240,60.6 1240,32 v1(1212,4)
  Bottom Layer w7: v1(744,555) 744,258 759,243 883,243 926,286 926,324.6 917.17,333.43 917.17,413.83 1010.34,507 1041.6,507 1053.1,518.5 1224.1,518.5 1226.6,516 1226.67,516 1338,404.67 1338,379.5 1349.5,368 1349.5,172.1 1316,138.6 1316,115.4 1338,93.4 1338,41.4 1324,27.4 1324,7.6 1299.4,-17 1264.6,-17 1243.6,4 v1(1212,4)
DIO3_SX: R4.1 U1.11 | length 109.2
  Top Layer w8: R4.1@1633.65,67.59 1634.68,67.59 1702.27,0 U1.11@1714.86,0
DIO4: U7.9
DIO4_SX: R5.4 U1.12 | length 76.7
  Top Layer w8: R5.4@1656.41,18.35 1700.35,-25.59 U1.12@1714.86,-25.59
DIO5: 1.17 U7.10 | length 1486.5
  Top Layer w7: 1.17@471.33,21.9 471.43,22 v1(534,22) ; v1(1215,105) 1220.48,110.48 U7.10@1220.48,153.9
  Bottom Layer w7: v1(534,22) 539.51,22 608.51,91 645.8,91 741.8,187 906.2,187 982,262.8 982,361.77 973.17,370.6 973.17,390.64 1033.53,451 1071.5,451 1083,462.5 1200.9,462.5 1282,381.4 1282,381 1281.59,380.59 1281.59,345.41 1293,334 1293,194.79 1243,144.79 1243,120 1228,105 v1(1215,105)
DIO5_SX: R5.3 U1.13 | length 95.4
  Top Layer w8: R5.3@1642.49,4.43 1698.1,-51.18 U1.13@1714.86,-51.18
DIO6: 1.6 R22.1 U7.11 | length 2277.3
  Top Layer w7: v1(230,250) 241.57,238.43 1.6@294.17,238.43 ; v1(239,403) 239,477.54 R22.1@247,485.54 ; U7.11@1240.16,153.9 1243,151.06 1243,77.4 1254,66.4 1254,53 v1(1282,25)
  Bottom Layer w7: v1(239,403) 206,370 206,274 241.4,238.6 506,238.6 522.4,255 545,255 596,306 655.2,306 746.2,215 894.6,215 954,274.4 954,350.17 945.17,359 945.17,402.23 1021.94,479 1058.5,479 1070,490.5 1212.5,490.5 1215,488 1215.07,488 1216.53,486.53 1216.53,486.47 1310,393 1310,361.5 1321.5,350 1321.5,183.7 1288,150.2 1288,103.8 1310,81.8 1310,53 v1(1282,25)
DIO7: 1.7 R23.1 U7.12 | length 2166.4
  Top Layer w7: v1(192,403) R23.1@192,485.54 ; 1.7@471.33,218.75 525.75,218.75 v1(534,227) ; U7.12@1259.85,153.9 1260,153.74 1260,92 v1(1282,70)
  Bottom Layer w7: v1(192,403) 192,248.4 218.4,222 529,222 v1(534,227) 536.8,227 601.4,291.6 ; 602,292 649.4,292 740.4,201 900.4,201 968,268.6 968,355.97 959.17,364.8 959.17,396.43 1027.73,465 1064.3,465 1075.8,476.5 1206.7,476.5 1296,387.2 1296,351.5 1307.5,340 1307.5,189.49 1260,141.99 1260,92 v1(1282,70)